# Altium PCB Fingerboardv5_eceshop.PcbDoc
Units mil, origin at the board's own origin, x right, y up, seen from the top; angles counter-clockwise.
Board outline 600 x 1050 mil, 2 copper layers (Top Layer, Bottom Layer); 12 components, 14 nets, 70 pads, 18 vias.
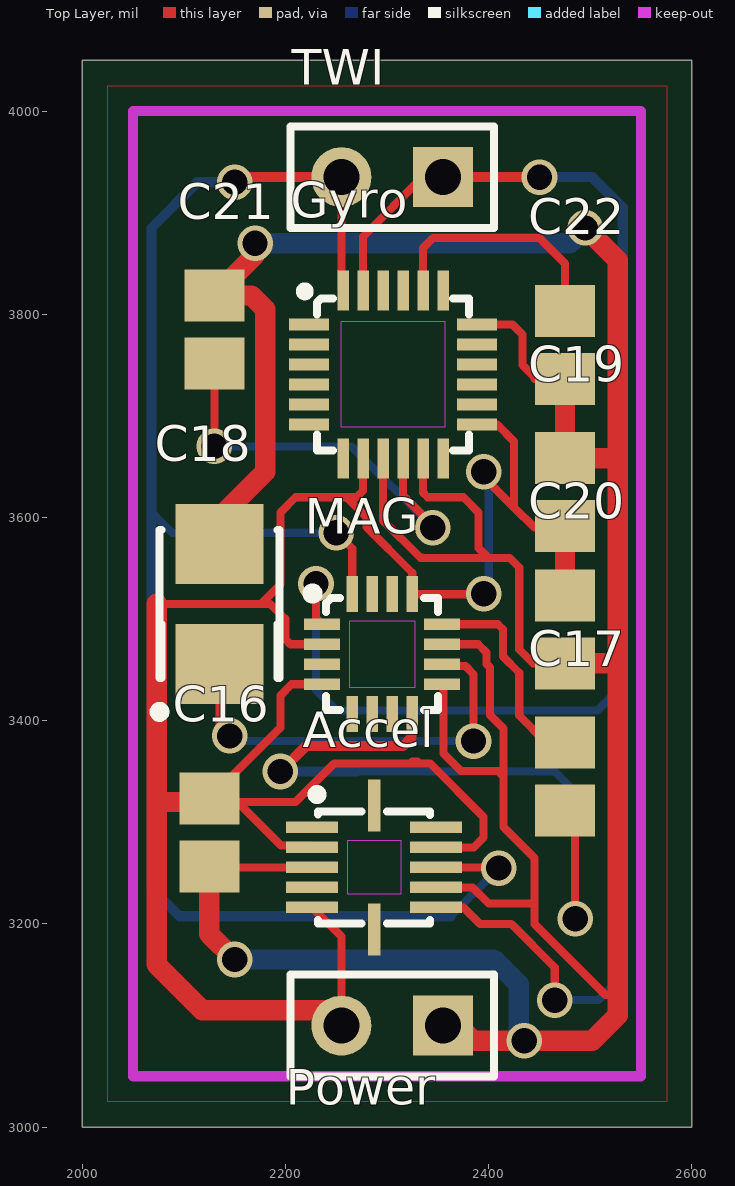
[diagram p0: Top Layer view]
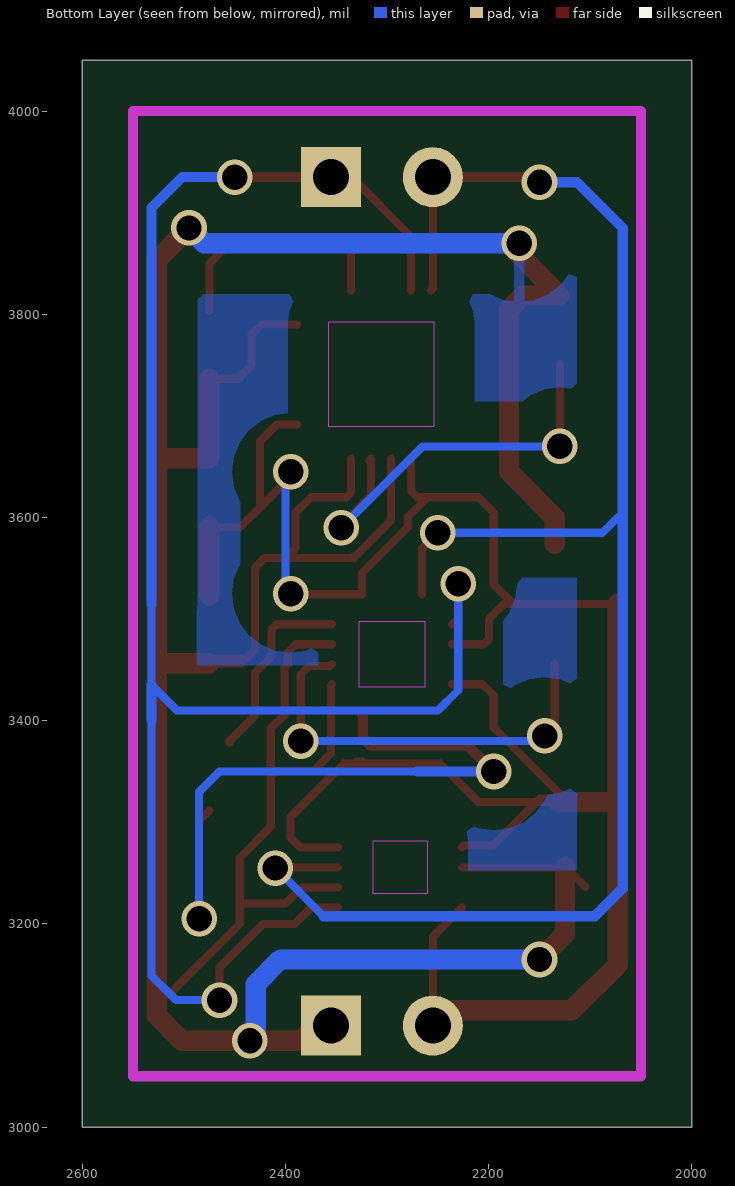
[diagram p1: Bottom Layer view, seen from below]

## Layer stack, top to bottom
Top Layer: signal copper 1.4
Dielectric: dielectric 12.6, FR-4, Dk 4.8
Bottom Layer: signal copper 1.4

## Board outline
2000,3000 2600,3000 2600,4050 2000,4050

## Design rules (kind name [scope] priority, off if disabled: settings)
Clearance "Polygon Clearance" [InPolygon] p1: gap=40
Clearance [All] p2: gap=8.1
HoleSize [All] p1: absolutevalues=TRUE maxlimit=100 minlimit=24 maxpercent=80.000 minpercent=20.000
PolygonConnect [All] p1: connectstyle=Relief reliefconductorwidth=10 reliefentries=4 polygonreliefangle="90 Angle"
RoutingVias [All] p1: holewidth=25 width=35 viastyle="Through Hole" minholewidth=25 minwidth=35 maxholewidth=25 maxwidth=35
SilkscreenOverComponentPads [All] p1: minsilkscreentomaskgap=10
SolderMaskExpansion [All] p1: expansion=4
Width [All] p1: maxlimit=50 minlimit=8 preferedwidth=8
26 further rules are at their usual default settings.

## Classes and differential pairs
net class TWI[1..0]: TWI0 TWI1
net class AUX_TWI[1..0]: AUX_TWI0 AUX_TWI1
component class U_IMU3000: C19 C20 C21 C22 Gyro
component class U_HMC5883L: C17 C18 MAG
component class U_BMA180: Accel C16
component class Fingerboard: Power TWI

## Components (designator, comment, footprint, x,y, rotation, side; value= is the part's Value field where it differs from the comment)
Accel "BMA180" "BMA180 - ECESHOP" 2240,3295 r270 top
C16 "Cap Semi" CAPC2012N 2125,3290 r90 top
C17 "Cap Semi" CAPC2012N 2475,3345 r90 top
C18 "Cap Pol1" TC3528-1411 2135,3515 r90 top
C19 "Cap Semi" CAPC2012N 2475,3625 r270 top
C20 "Cap Semi" CAPC2012N 2475,3490 r90 top
C21 "Cap Semi" CAPC2012N 2130,3785 r270 top
C22 "Cap Semi" CAPC2012N 2475,3770 r90 top
Gyro "IMU3000" "IMU3000 - ECESHOP" 2235,3790 r0 top
MAG "HMC5883L" "HMC5883L - ECESHOP" 2245,3495 r0 top
Power "Header 2" HDR1X2 2355,3100 r180 top
TWI "TWI" HDR1X2 2355,3935 r180 top

## Footprints (in the part's own frame and the unit in brackets; to place one, negate y for a bottom-side part, rotate by r counter-clockwise, add the part's x,y. Pads: shape width x height; smd on the part's side, far side on the other; paste and mask are expansions set on the pad)
"BMA180 - ECESHOP" [mm] "BMA180 - ECESHOP"
  rect 0.29x1.3 smd: 1(0,-0.35) 2(0.5,-0.35) 3(1,-0.35) 4(1.5,-0.35) 5(2,-0.35) 7(2,2.75) 8(1.5,2.75) 9(1,2.75) 10(0.5,2.75) 11(0,2.75)
  rect 1.3x0.32 smd: 6(2.55,1.2) 12(-0.55,1.2)
  Keep-Out Layer region: 0.328,0.524 1.658,0.524 1.658,1.876 0.328,1.876
  silkscreen extent -0.91,-0.31 2.4,2.6
CAPC2012N [mm] "Chip Capacitor, Body 2.0x1.3mm, IPC Medium Density"
  rect 1.3x1.5 smd: 1(-0.85,0) 2(0.85,0)
  body extent -1.1,-0.72 1.1,0.72, height 1.1
HDR1X2 [mm] "Connector; Header; 2 Position"
  rect 1.5x1.5 hole 0.9: 1(0,0)
  round 1.5 hole 0.9: 2(2.54,0)
  silkscreen extent -1.27,-1.27 3.81,1.27
"HMC5883L - ECESHOP" [mm]
  rect 0.9x0.29 smd: 1(-0.225,0) 2(-0.225,-0.5) 3(-0.225,-1) 4(-0.225,-1.5) 9(2.775,-1.5) 10(2.775,-1) 11(2.775,-0.5) 12(2.775,0)
  rect 0.29x0.9 smd: 5(0.525,-2.25) 6(1.025,-2.25) 7(1.525,-2.25) 8(2.025,-2.25) 13(2.025,0.75) 14(1.525,0.75) 15(1.025,0.75) 16(0.525,0.75)
  Keep-Out Layer region: 0.452,-1.572 2.099,-1.572 2.099,0.075 0.452,0.075
  silkscreen extent -0.57,-2.15 2.67,0.87
"IMU3000 - ECESHOP" [mm]
  rect 1x0.29 smd: 1(-0.3,0) 2(-0.3,-0.5) 3(-0.3,-1) 4(-0.3,-1.5) 5(-0.3,-2) 6(-0.3,-2.5) 13(3.9,-2.5) 14(3.9,-2) 15(3.9,-1.5) 16(3.9,-1) 17(3.9,-0.5) 18(3.9,0)
  rect 0.29x1 smd: 7(0.55,-3.35) 8(1.05,-3.35) 9(1.55,-3.35) 10(2.05,-3.35) 11(2.55,-3.35) 12(3.05,-3.35) 19(3.05,0.85) 20(2.55,0.85) 21(2.05,0.85) 22(1.55,0.85) 23(1.05,0.85) 24(0.55,0.85)
  Keep-Out Layer region: 0.488,-2.562 3.109,-2.562 3.109,0.066 0.488,0.066
  silkscreen extent -0.48,-3.15 3.7,0.9
TC3528-1411 [mm] "Capacitor, SM Tantalum; Body 3.5 x 2.8 mm (LxW typ)"
  rect 2x2.2 smd: 1(-1.5,0) 2(1.5,0)
  silkscreen extent -2.82,-1.5 1.85,1.62

## Part data
C16 C17 C19 C20 C21 C22: "Capacitor (Semiconductor SIM Model)"
C18: "Polarized Capacitor (Radial)"
Power: "Header, 2-Pin"
TWI: library part "Header 2", "Header, 2-Pin"

## Via types
v1: diameter 35, hole 25, Top Layer to Bottom Layer, 18 vias

## Nets (pads, with @x,y where several pads share a name; then routed paths per layer and width w, separated by ;. In a path a pad name is that pad's centre, name@x,y a point inside that pad or via, vN(x,y) a via of type N, cw(c..) or ccw(c..) an arc to the next point about the centre after c; other vN are vias at no path point)
3.3VCC: Accel.2 Accel.5 Accel.10 C16.2 C19.2 C20.2 Gyro.8 Gyro.13 MAG.2 MAG.4 MAG.13 Power.2 | length 2440.7
  Top Layer w8: 2073.1,3515 2175.73,3515 ; C16.2 C16.2@2125.33,3323.46 ; C16.2@2131.54,3320 C16.2@2152.81,3320 ; 2195,3320 2210,3320 2247.9,3357.9 2322.66,3357.9 ; 2205,3320 C16.2@2152.81,3320 ; Accel.5 2255,3187.48 2255,3115 Power.2 ; Accel.2 2224.34,3277.19 2195.62,3277.19 C16.2@2152.81,3320 ; MAG.4 2205.95,3435.95 2195,3425 2195,3393.14 C16.2@2125.33,3323.46 ; MAG.2 2205.32,3475.32 2205,3475 2199.68,3480.32 2199.68,3500.32 2185,3515 2175.73,3515 ; Gyro.8 2276.34,3626.34 2270,3620 2260,3620 ; 2330,3360 2324.76,3360 2322.66,3357.9 ; Accel.10 2385.32,3275.32 2395,3285 2395,3305.37 2342.47,3357.9 2322.66,3357.9 ; Gyro.13 2408.43,3691.57 2425,3675 2425,3610 ; v1(2395,3525) 2394.53,3524.53 MAG.13 2324.72,3545.65 2279.65,3590.72 2279.65,3600.35 2260,3620 ; v1(2395,3645) 2395,3640 2425,3610 ; C19.2 2473.46,3590 2445,3590 2425,3610 ; C16.2@2125.33,3323.46 2149.34,3323.46 C16.2@2152.81,3320 ; 2175.73,3515 2195,3534.27 2195,3605 2210,3620 2260,3620
  Top Layer w20: 2073.1,3515 2073.1,3320 ; C16.2@2131.54,3320 2073.1,3320 ; Power.2@2255,3115 2118.1,3115 2073.1,3160 2073.1,3320 ; C20.2 C19.2
  Bottom Layer w8: v1(2395,3525) 2400,3530 2400,3640 v1(2395,3645)
AUX_TWI0: Gyro.7
AUX_TWI1: Gyro.6
GND: Accel.3 Accel.8 C16.1 C18.2 C19.1 C20.1 C21.1 C22.1 Gyro.9 Gyro.11 Gyro.18 MAG.9 MAG.11 Power.1 | length 3841.2
  Top Layer w8: C16.1@2105,3236.54 C16.1 2125.91,3255.63 Accel.3 ; Gyro.9 2296.02,3597.12 2332.74,3560.4 2334.6,3560.4 2335,3560 2400,3560 ; Gyro.11 2335.39,3624.61 2340,3620 2375,3620 2390,3605 2390,3570 2400,3560 ; Accel.8 2384.05,3235.95 2400,3220 2445,3220 ; MAG.9 2355.4,3434.8 2355.4,3367.74 2372.74,3350.4 2409.2,3350.4 2414.6,3345 ; MAG.11 2389.68,3475.32 2397.8,3467.2 2397.8,3455.7 2401.1,3452.4 2401.1,3405.76 2414.6,3392.26 2414.6,3345 ; Power.1 2360,3120 Power.1@2355,3115 ; Gyro.18 2423.37,3790 2433.37,3780 2433.37,3750 2445,3738.37 2445,3736.63 2474.91,3736.63 C22.1 ; 2526.9,3130 2515,3130 2445,3200 2445,3220 ; 2400,3560 2420.69,3560 2430,3550.69 2430,3470 2439.05,3460.95 ; 2414.6,3345 2414.6,3295.4 2445,3265 2445,3220 ; 2439.05,3460.95 2443.46,3456.54 C20.1 2470.59,3460.95 2439.05,3460.95
  Top Layer w20: C16.1 2125,3190 v1(2150,3165) ; C18.2 2135,3600 2180,3645 2180,3805 2166.54,3818.46 C21.1 2170,3858.46 v1(2170,3870) ; Power.1 Power.1@2370,3085 ; Power.1@2355,3115 2385,3085 v1(2435,3085) 2501.9,3085 2526.9,3110 2526.9,3130 2526.9,3460 ; C20.1 2523.44,3456.54 2526.9,3460 ; C22.1 C19.1 2523.44,3658.46 2526.9,3655 ; v1(2495,3885) 2526.9,3853.1 2526.9,3655 ; 2526.9,3460 2526.9,3655
  Bottom Layer w20: v1(2150,3165) 2405,3165 2429.4,3140.6 2429.4,3090.6 v1(2435,3085) ; v1(2170,3870) 2480,3870 v1(2495,3885)
NetAccel_4: Accel.4
NetC17_1: C17.1 MAG.8 | length 700.1
  Top Layer w8: C17.1 2485,3301.54 v1(2485,3205)
  Top Layer w10: v1(2195,3350) 2220,3375 2315.57,3375 2323.85,3383.27 2323.85,3405.54 MAG.8
  Bottom Layer w8: 2270,3350 2465,3350 2485,3330 v1(2485,3205)
  Bottom Layer w10: v1(2195,3350) 2270,3350
NetC17_2: C17.2 MAG.12 | length 190.3
  Top Layer w8: MAG.12 2408.9,3495 2413.9,3490 2413.9,3463.33 2430,3447.23 2430,3405 2455,3380 C17.2@2455,3378.46
NetC18_1: C18.1 MAG.10 | length 417.7
  Top Layer w8: C18.1 2135,3395 v1(2145,3385) ; MAG.10 2356.13,3453.75 2376.98,3453.75 2385,3445.73 v1(2385,3380)
  Bottom Layer w8: v1(2145,3385) 2150,3380 v1(2385,3380)
NetC21_2: C21.2 Gyro.10 | length 412.6
  Top Layer w8: v1(2130,3670) C21.2 ; Gyro.10@2317.58,3656.23 Gyro.10 2315.71,3621.52 2345,3592.23 v1(2345,3590)
  Bottom Layer w8: v1(2130,3670) 2265,3670 v1(2345,3590)
NetC22_2: C22.2 Gyro.20 | length 242.4
  Top Layer w8: Gyro.20 2335.39,3865.39 2345,3875 2450,3875 2475,3850 C22.2
NetGyro_12: Gyro.12
NetINT_3: MAG.15
TWI0: Accel.7 Gyro.23 MAG.1 TWI.1 | length 1819.5
  Top Layer w8: v1(2230,3535) 2230,3501.14 MAG.1 ; Gyro.23 2276.34,3876.34 2335,3935 TWI.1 ; Accel.7 2375,3216.26 2391.26,3200 2422.23,3200 2465,3157.23 v1(2465,3125)
  Top Layer w10: TWI.1 v1(2450,3935)
  Bottom Layer w8: v1(2230,3535) 2230,3430 2250,3410 2506.9,3410 2531.9,3435 2531.9,3515 ; v1(2465,3125) 2507.9,3125 2531.9,3149 2531.9,3400
  Bottom Layer w10: v1(2450,3935) 2501.9,3935 2531.9,3905 2531.9,3515 ; 2531.9,3400 2531.9,3435
TWI1: Accel.9 Gyro.24 MAG.16 TWI.2 | length 1669.9
  Top Layer w8: v1(2250,3585) 2265.67,3569.33 MAG.16 ; TWI.2 2255,3825.12 Gyro.24 ; Accel.9 2409.37,3255.63 v1(2410,3255) v1@2404.37,3260.63
  Top Layer w10: v1(2150,3930) 2155,3935 TWI.2
  Bottom Layer w8: 2068.1,3605 2088.1,3585 v1(2250,3585) ; 2362.5,3207.5 v1(2410,3255)
  Bottom Layer w10: v1(2150,3930) 2113.1,3930 2068.1,3885 2068.1,3605 2068.1,3235 2095.6,3207.5 2362.5,3207.5
pads on no net: Accel.1 Accel.6 Accel.11 Accel.12 Gyro.1 Gyro.2 Gyro.3 Gyro.4 Gyro.5 Gyro.14 Gyro.15 Gyro.16 Gyro.17 Gyro.19 Gyro.21 Gyro.22 MAG.3 MAG.5 MAG.6 MAG.7 MAG.14

## Polygon pours and split planes (outlines as drawn)
GND on Top Layer "Top Layer-GND" (solid, pour order 2): 2025,4025 2575,4025 2575,3025 2025,3025
GND on Bottom Layer "Bottom Layer-GND" (solid, pour order 4): 2025,4025 2575,4025 2575,3025 2025,3025

## Keep-outs
Keep-Out Layer:
  lines w10: 2050,3050 2050,4000 2550,4000 2550,3050 2050,3050

## Dimensions
2050,3050 to 2050,4000 on Mechanical 1
2050,3050 to 2550,3050 on Mechanical 1